# EAGLE board pr0board_key (EAGLE 9.6.2)
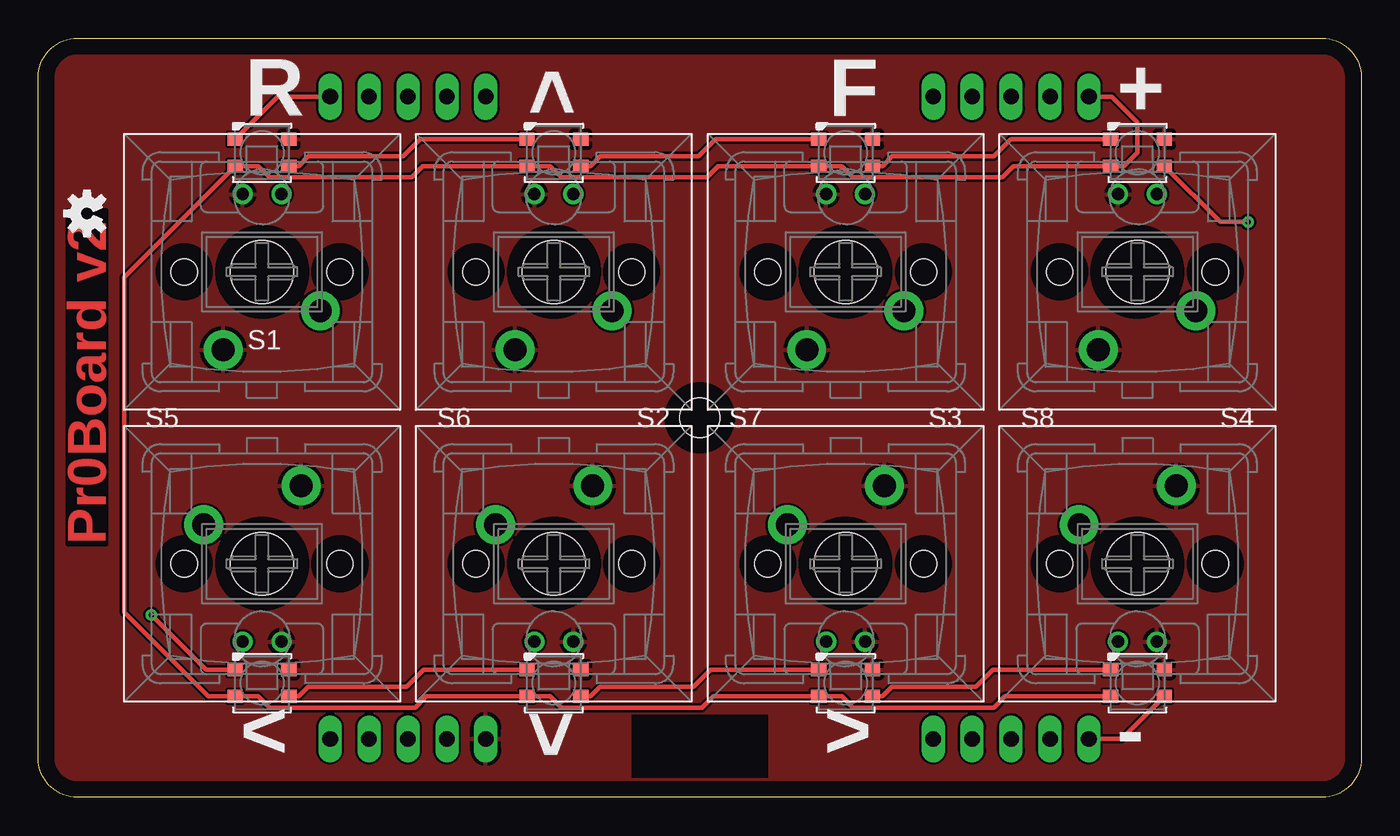
[diagram p0: board, top side]
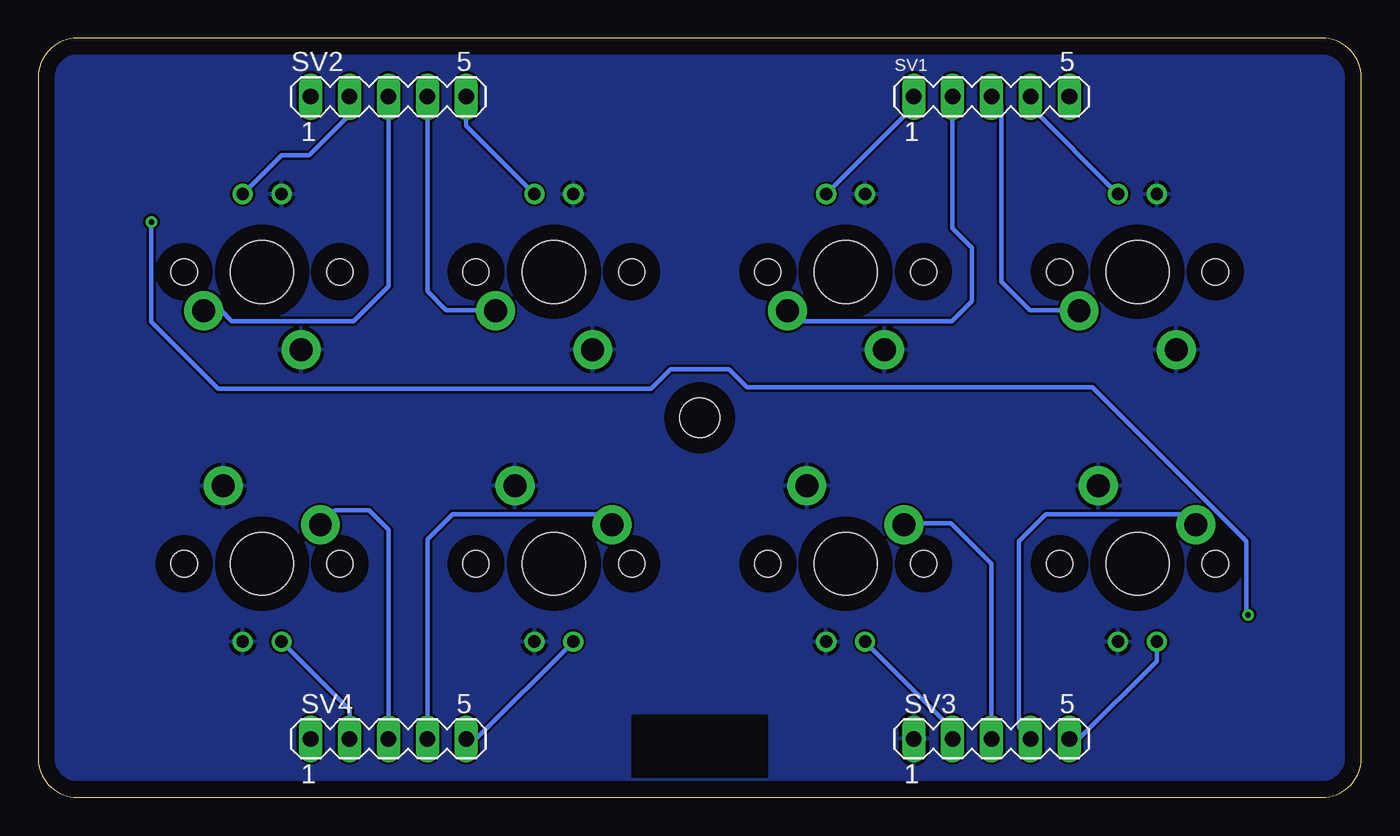
[diagram p1: board, bottom side, seen from below]

Size 86.36 x 49.53 mm. Coordinates in mm from the lower left corner, seen from the top.
Outline: 0,2.54 0,46.99 arc-90 2.54,49.53 83.82,49.53 arc-90 86.36,46.99 86.36,2.54 arc-90 83.82,0 2.54,0 arc-90 0,2.54
Copper layers (1*16): Top 0.035mm / dielectric 1.5mm / Bottom 0.035mm
Design rules "default": minimum track width 6mil, minimum drill 0.35mm, track to track 6mil, track to pad 6mil, pad to pad 6mil, via to via 6mil, smd to smd 6mil, copper to edge 40mil, drill to drill 6mil, minimum pad ring 10mil, minimum via ring 8mil, stop-mask expansion 4mil, vias tented up to drill 0mil, thermal gap 10mil
Holes 2.6 mm at 43.18,24.77
tRestrict: area 38.7,1.3 to 47.6,5.4; area 38.7,1.3 to 47.6,5.4
bRestrict: area 38.7,1.3 to 47.6,5.4

## Footprints (pad centres in the part's own frame; a part is rotated, then mirrored left to right if it is on the bottom)
LED3535 = smd 1 x 0.85: 1 -1.75,0.875; 2 -1.75,-0.875; 3 1.75,-0.875; 4 1.75,0.875
CHERRY_MX_LED = drill 0.8: L1 -1.27,-5.08; L2 1.27,-5.08 | drill 1.5 pad 2.54: S1 -3.81,2.54; S2 2.54,5.08 | hole 1.7: -5.08,0; 5.08,0 | hole 4.1: 0,0
MA05-1 = drill 1.016 long: 1 -5.08,0; 2 -2.54,0; 3 0,0; 4 2.54,0; 5 5.08,0

## Placement (x,y rotation side)
LED4  WS2812B3535  [LED3535]  14.61,42.07 0 top
LED5  WS2812B3535  [LED3535]  33.66,42.07 0 top
LED6  WS2812B3535  [LED3535]  52.7,42.07 0 top
LED7  WS2812B3535  [LED3535]  71.75,42.07 0 top
LED8  WS2812B3535  [LED3535]  14.61,7.46 0 top
LED9  WS2812B3535  [LED3535]  33.66,7.46 0 top
LED10  WS2812B3535  [LED3535]  52.7,7.46 0 top
LED11  WS2812B3535  [LED3535]  71.75,7.46 0 top
M1  DSA_KEYCAP  [DSA_KEYCAP]  14.61,34.29 180 top
M2  DSA_KEYCAP  [DSA_KEYCAP]  33.66,34.29 180 top
M3  DSA_KEYCAP  [DSA_KEYCAP]  52.7,34.29 180 top
M4  DSA_KEYCAP  [DSA_KEYCAP]  71.75,34.29 180 top
M5  DSA_KEYCAP  [DSA_KEYCAP]  14.61,15.24 0 top
M6  DSA_KEYCAP  [DSA_KEYCAP]  33.66,15.24 0 top
M7  DSA_KEYCAP  [DSA_KEYCAP]  52.7,15.24 0 top
M8  DSA_KEYCAP  [DSA_KEYCAP]  71.75,15.24 0 top
S1  CPG151101S13 C404353  [CHERRY_MX_LED]  14.61,34.29 180 top
S2  CPG151101S13 C404353  [CHERRY_MX_LED]  33.66,34.29 180 top
S3  CPG151101S13 C404353  [CHERRY_MX_LED]  52.7,34.29 180 top
S4  CPG151101S13 C404353  [CHERRY_MX_LED]  71.75,34.29 180 top
S5  CPG151101S13 C404353  [CHERRY_MX_LED]  14.61,15.24 0 top
S6  CPG151101S13 C404353  [CHERRY_MX_LED]  33.66,15.24 0 top
S7  CPG151101S13 C404353  [CHERRY_MX_LED]  52.7,15.24 0 top
S8  CPG151101S13 C404353  [CHERRY_MX_LED]  71.75,15.24 0 top
SV1  [MA05-1]  24.13,45.72 0 bottom
SV2  [MA05-1]  63.5,45.72 0 bottom
SV3  [MA05-1]  24.13,3.81 0 bottom
SV4  [MA05-1]  63.5,3.81 0 bottom
U$1  OSHW-LOGOS  [OSHW-LOGO-S]  3.17,38.1 90 top

## Library data of the parts
LED4-LED11 = adafruit
M1-M8 = cherry
S1-S8 = cherry; FARNELL: 2292961; MOUSER: 540_MX1A_11NW
SV1-SV4 = con-lstb; OC_FARNELL: unknown; OC_NEWARK: unknown
U$1 = SparkFun

## Nets
DIDO: LED7.3 LED8.1
GND: LED4.4 LED5.4 LED6.4 LED7.4 LED8.4 LED9.4 LED10.4 LED11.4 S1.L2 S1.S2 S2.L2 S2.S2 S3.L2 S3.S2 S4.L2 S4.S2 S5.L2 S5.S2 S6.L2 S6.S2 S7.L2 S7.S2 S8.L2 S8.S2 SV3.1
KEY_L_1: S1.L1 SV1.4
KEY_L_2: S2.L1 SV1.1
KEY_L_3: S3.L1 SV2.5
KEY_L_4: S4.L1 SV2.2
KEY_L_5: S5.L1 SV3.5
KEY_L_6: S6.L1 SV3.2
KEY_L_7: S7.L1 SV4.5
KEY_L_8: S8.L1 SV4.2
KEY_S_1: S1.S1 SV1.3
KEY_S_2: S2.S1 SV1.2
KEY_S_3: S3.S1 SV2.4
KEY_S_4: S4.S1 SV2.3
KEY_S_5: S5.S1 SV3.4
KEY_S_6: S6.S1 SV3.3
KEY_S_7: S7.S1 SV4.4
KEY_S_8: S8.S1 SV4.3
N$8: LED4.3 LED5.1
N$9: LED5.3 LED6.1
N$10: LED6.3 LED7.1
N$13: LED8.3 LED9.1
N$14: LED9.3 LED10.1
N$15: LED10.3 LED11.1
WS2812BDI: LED4.1 SV1.5
WS2812BDO: LED11.3 SV4.1
WSVCC: LED4.2 LED5.2 LED6.2 LED7.2 LED8.2 LED9.2 LED10.2 LED11.2 SV2.1

## Tracks (layer width: path | path; a pad name or v marks a point on that pad's centre or on a via)
DIDO  (via drill 0.35)
  Top 0.305: LED8.1 10.95,8.34 v7.38,11.91 | v78.98,37.54 77.15,37.54 LED7.3
  Bottom 0.305: v7.38,11.91 7.51,12.03 7.51,16.72 17.54,26.75 40.08,26.75 41.27,27.94 45.09,27.94 46.35,26.67 74.61,26.67 78.98,31.04 v78.98,37.54
GND
  pour Bottom: -7.78,-12.3 -7.78,102.87 89.22,102.87 89.22,-12.3
  pour Top: -1.27,-8.65 -1.27,101.92 90.73,101.92 90.73,-8.65 81.84,-8.65
KEY_L_1
  Bottom 0.305: SV1.4 21.59,45.09 S1.L1
KEY_L_2
  Bottom 0.305: S2.L1 29.21,45.09 SV1.1
KEY_L_3
  Bottom 0.305: SV2.5 58.42,43.81 S3.L1
KEY_L_4
  Bottom 0.305: SV2.2 66.04,44.54 68.67,41.91 70.48,41.91 S4.L1
KEY_L_5
  Bottom 0.305: S5.L1 13.34,8.89 18.41,3.81 SV3.5
KEY_L_6
  Bottom 0.305: SV3.2 26.67,4.45 S6.L1
KEY_L_7
  Bottom 0.305: SV4.5 57.78,3.81 S7.L1
KEY_L_8
  Bottom 0.305: SV4.2 66.04,5.71 S8.L1
KEY_S_1
  Bottom 0.305: S1.S1 18.46,31.8 21.63,31.8 23.5,33.66 23.5,45.09 SV1.3
KEY_S_2
  Bottom 0.305: SV1.2 26.67,37.15 25.4,35.88 25.4,32.38 26.71,31.07 36.79,31.07 S2.S1
KEY_S_3
  Bottom 0.305: SV2.4 60.96,33.02 59.73,31.8 56.56,31.8 S3.S1
KEY_S_4
  Bottom 0.305: SV2.3 63.5,33.34 65.77,31.07 73.72,31.07 74.4,31.75 S4.S1
KEY_S_5
  Bottom 0.305: S5.S1 11.47,18.46 20.59,18.46 22.34,16.71 22.34,4.56 SV3.4
KEY_S_6
  Bottom 0.305: S6.S1 29.73,17.89 26.79,17.89 24.13,15.24 SV3.3
KEY_S_7
  Bottom 0.305: S7.S1 49.57,18.46 59.33,18.46 60.96,16.82 SV4.4
KEY_S_8
  Bottom 0.305: SV4.3 63.5,17.46 64.77,18.73 66.99,18.73 S8.S1
N$8
  Top 0.305: LED4.3 16.99,41.19 17.62,41.83 23.81,41.83 24.93,42.94 LED5.1
N$9
  Top 0.305: LED5.3 36.04,41.19 36.67,41.83 43.1,41.83 44.21,42.94 LED6.1
N$10
  Top 0.305: LED6.3 55.09,41.19 55.73,41.83 62.39,41.83 63.5,42.94 LED7.1
N$13
  Top 0.305: LED8.3 16.99,6.59 17.62,7.22 24.05,7.22 25.16,8.34 LED9.1
N$14
  Top 0.305: LED9.3 36.04,6.59 36.67,7.22 42.78,7.22 43.9,8.34 LED10.1
N$15
  Top 0.305: LED10.3 55.09,6.59 55.73,7.22 61.2,7.22 62.31,8.34 LED11.1
WS2812BDI
  Top 0.305: LED4.1 15.63,45.72 SV1.5
WS2812BDO
  Top 0.305: SV4.1 70.73,3.81 LED11.3
WSVCC
  Top 0.305: LED10.2 50.8,6.59 | 50.8,6.59 44.06,6.59 43.33,5.86 34.14,5.86 33.41,6.59 LED9.2 25.33,6.59 24.6,5.86 15.09,5.86 14.36,6.59 LED8.2 12.83,6.61 11.08,6.61 5.6,12.09 5.6,33.94 LED4.2 14.36,41.19 15.09,40.46 24.36,40.46 25.09,41.19 LED5.2 33.41,41.19 34.14,40.46 43.65,40.46 44.38,41.19 50.8,41.19 | LED11.2 63.11,6.59 62.38,5.86 53.19,5.86 52.46,6.59 50.8,6.59 | LED6.2 50.8,41.19 | 50.8,41.19 52.46,41.19 53.19,40.46 62.94,40.46 63.67,41.19 LED7.2 70.88,41.19 71.75,42.07 71.75,44.05 70.09,45.72 SV2.1

## Text on the board
Top: Pr0Board v2
tNames: R | > | F | + | < | < | > | -
tStop: Pr0Board v2